# Altium PCB USB-TO-UART.PcbDoc
Units mm, origin at the board's own origin, x right, y up, seen from the top; angles counter-clockwise.
Board outline 51.43 x 35.05 mm, 2 copper layers (Top Layer, Bottom Layer); 35 components, 28 nets, 133 pads, 24 vias.
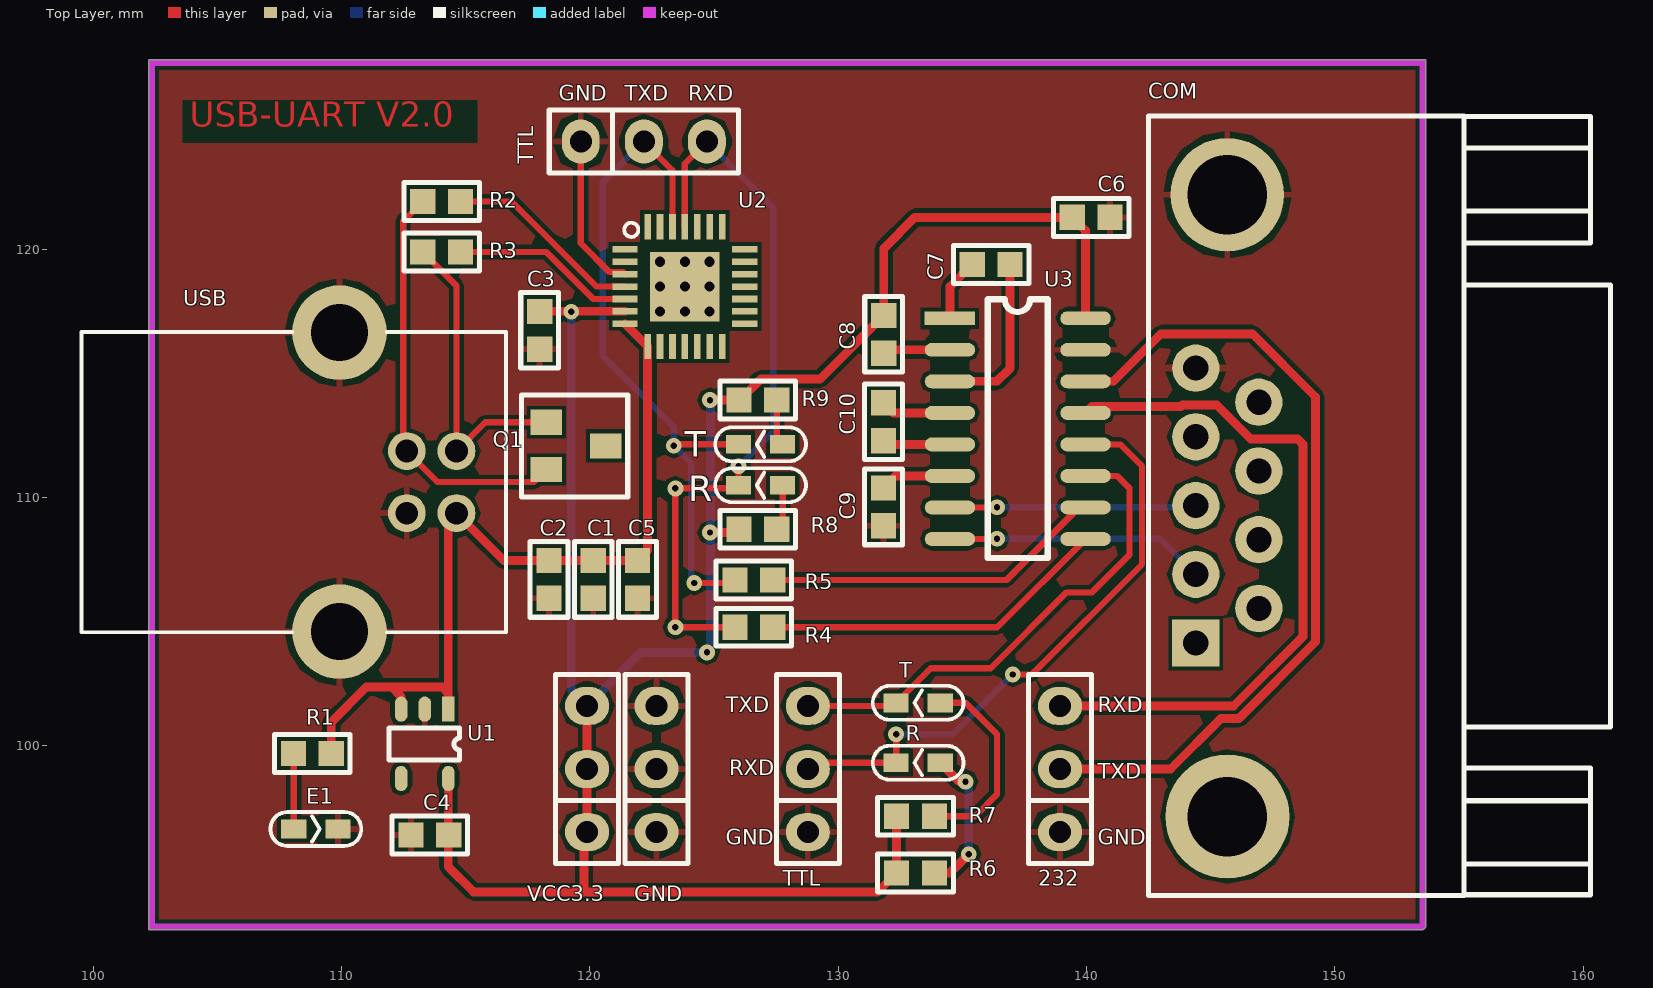
[diagram p0: Top Layer view]
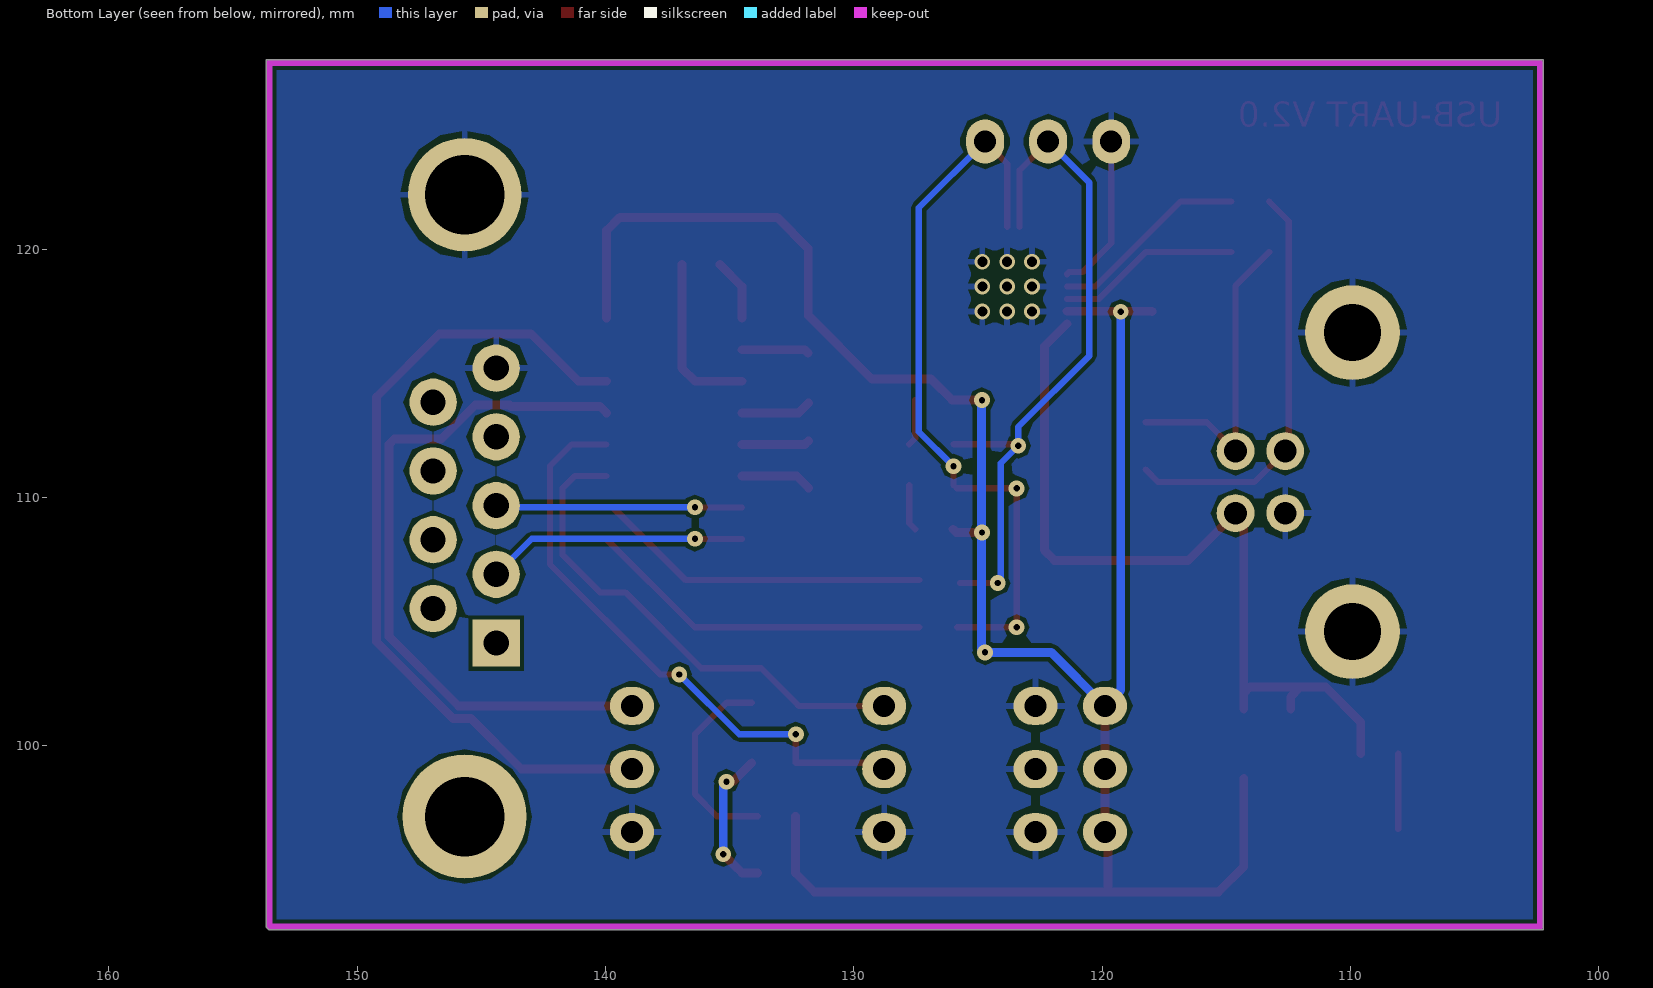
[diagram p1: Bottom Layer view, seen from below]
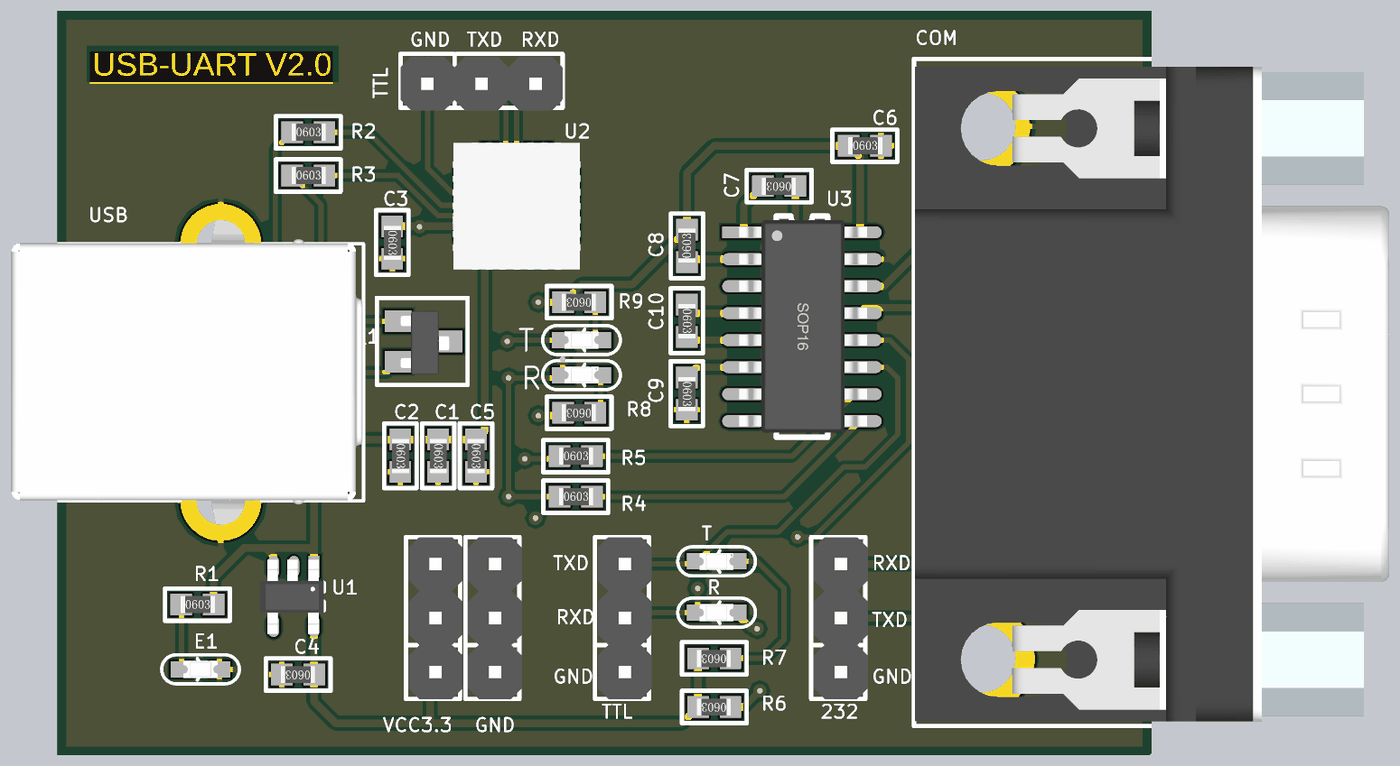
[diagram p2: 3D render of the assembled board from above, using the file's embedded part models]

## Layer stack, top to bottom
Top Layer: signal copper 0.0356
Dielectric: dielectric 0.32, FR-4, Dk 4.8
Bottom Layer: signal copper 0.0356

## Board outline
153.67,127.635 153.67,92.71 153.543,92.583 102.235,92.583 102.235,127.635

## Design rules (kind name [scope] priority, off if disabled: settings)
Clearance [All] p1: gap=0.154
DiffPairsRouting [All] p1: maxlimit=0.254 minlimit=0.054 mostfreqgap=0.254 maxuncoupledlength=12.7
HoleSize [All] p1: absolutevalues=TRUE maxlimit=2.54 minlimit=0.001 maxpercent=80.000 minpercent=20.000
HoleToHoleClearance [All] p1: gap=0 allowstackedmicrovias=TRUE
MinimumSolderMaskSliver [All] p1: minsoldermaskwidth=0
PolygonConnect [All] p1: connectstyle=Relief reliefconductorwidth=0.254 reliefentries=4 polygonreliefangle="90 Angle" airgapwidth=0.254
RoutingVias [All] p1: holewidth=0.711 width=0.27 viastyle="Through Hole" minholewidth=0.011 minwidth=0.27 maxholewidth=0.711 maxwidth=1.27
SilkToSilkClearance [All] p1: silktosilkclearance=0
SilkToSolderMaskClearance [IsPad] p1: minsilkscreentomaskgap=0 clearancetoexposedcopper=TRUE
SolderMaskExpansion [All] p1: expansion=0.102
Width [All] p1: maxlimit=0.354 minlimit=0.054 preferedwidth=0.254
22 further rules are at their usual default settings.

## Components (designator, comment, footprint, x,y, rotation, side; value= is the part's Value field where it differs from the comment)
232 "232" "3 PIN" 138.938,96.52 r90 top (schematic designator CON3)
C1 "10uF" 0603 120.142,107.442 r270 top
C2 "10uF" 0603 118.364,107.442 r270 top
C3 "10uF" 0603 117.983,117.475 r270 top
C4 "10uF" 0603 114.3,96.393 r180 top
C5 "10uF" 0603 121.92,107.442 r270 top
C6 "10uF" 0603 139.446,121.285 r0 top
C7 "10uF" 0603 136.906,119.38 r180 top
C8 "10uF" 0603 131.826,115.824 r90 top
C9 "10uF" 0603 131.826,110.363 r270 top
C10 "10uF" 0603 131.826,113.792 r270 top
COM "UART1" DB9-MALE 144.399,104.14 r180 top (schematic designator COM1)
E1 "LED" LED_0603L 107.823,96.647 r0 top
GND "GND" "3 pin" 122.682,96.52 r90 top (schematic designator CON2)
Q1 "ESD" SOT32-809 118.237,111.125 r0 top
R "LED" LED_0603L 128.016,110.49 r180 top (schematic designator E4)
R "LED" LED_0603L 134.366,99.314 r180 top (schematic designator E2)
R1 "1K" 0603 108.077,99.695 r0 top
R2 "22" 0603 113.284,121.92 r0 top
R3 "22" 0603 113.284,119.888 r0 top
R4 "0" 0603 125.857,104.775 r0 top
R5 "0" 0603 125.857,106.68 r0 top
R6 "1K" 0603 133.858,94.869 r180 top
R7 "1K" 0603 133.858,97.155 r180 top
R8 "1K" 0603 127.508,108.712 r180 top
R9 "1K" 0603 127.508,113.919 r180 top
T "LED" LED_0603L 128.016,112.141 r180 top (schematic designator E5)
T "LED" LED_0603L 134.366,101.727 r180 top (schematic designator E3)
TTL "232" "3 pin" 119.634,124.333 r0 top (schematic designator CON4)
TTL "232" "3 pin" 128.778,96.52 r90 top (schematic designator CON5)
U1 "SPX3819" SOT-23-5 114.3,101.473 r270 top
U2 "CP2102" QFN28 123.825,118.491 r0 top
U3 "SP3232" SO16 134.493,117.221 r0 top
USB "USB" USB-TB 108.077,110.617 r270 top (schematic designator USB1)
VCC3.3 "VCC3.3" "3 pin" 119.888,96.52 r90 top (schematic designator CON1)

## Footprints (in the part's own frame and the unit in brackets; to place one, negate y for a bottom-side part, rotate by r counter-clockwise, add the part's x,y. Pads: shape width x height; smd on the part's side, far side on the other; paste and mask are expansions set on the pad)
"3 PIN" [mil] "3脚传感器"
  oval 60x70 hole 35: 1(0,0) 2(100,0) 3(200,0)
  silkscreen extent -50,-50 250,50, body extent -50,-55 250,45, height 453
"3 pin" [mil] "3脚传感器"
  oval 60x70 hole 35: 1(0,0) 2(100,0) 3(200,0)
  silkscreen extent -50,-50 250,50, body extent -50,-55 250,45, height 453
0603 [mil] "0603封装"
  rect 40x40 smd: 1(-0.68,-0.23) 2(59.32,-0.23)
  silkscreen extent -31,-30 89,30, body extent -1,-16 62,16, height 18
DB9-MALE [mil] "DB9公头接口"
  rect 75x75 hole 40: 1(-0.16,0.28)
  round 75 hole 40: 2(-0.16,-108.72) 3(-0.16,-217.72) 4(-0.16,-326.72) 5(-0.16,-435.72) 6(-100.16,-54.72) 7(-100.16,-163.72) 8(-100.16,-272.72) 9(-100.16,-381.72)
  round 196.85 hole 126: 10(-50.16,275.28)
  round 180 hole 126: 11(-50.17,-710.72)
  silkscreen extent -658,-836 75,400, body extent -805,-821 73,391, height 482
LED_0603L [mil] "LED"
  rect 40x30 smd: 1(10,0) 2(80,0)
  silkscreen extent -27,-27 117,27, body extent 14,-16 77,16, height 24
QFN28 [mil] "QFN28"
  rect 40x10.5 smd: 1(-95,59.06) 2(-95,39.37) 3(-95,19.69) 4(-95,0) 5(-95,-19.69) 6(-95,-39.37) 7(-95,-59.06) 15(95,59.06) 16(95,39.37) 17(95,19.69) 18(95,0) 19(95,-19.69) 20(95,-39.37) 21(95,-59.06)
  rect 110x110 smd: 3(0,0)
  rect 10.5x40 smd: 8(-59.06,-95) 9(-39.37,-95) 10(-19.69,-95) 11(0,-95) 12(19.69,-95) 13(39.37,-95) 14(59.06,-95) 22(59.06,95) 23(39.37,95) 24(19.69,95) 25(0,95) 26(-19.69,95) 27(-39.37,95) 28(-59.06,95)
  silkscreen extent -96,79 -74,101, body extent -118,-120 118,116, height 40
SO16 [mil] "232"
  rect 80x22 smd: 1(0.38,-0.24)
  oval 80x22 smd: 2(0.38,-50.24) 3(0.38,-100.24) 4(0.38,-150.24) 5(0.38,-200.24) 6(0.38,-250.24) 7(0.38,-300.24) 8(0.38,-350.24) 9(215.38,-350.24) 10(215.38,-300.24) 11(215.38,-250.24) 12(215.38,-200.24) 13(215.38,-150.24) 14(215.38,-100.24) 15(215.38,-50.24) 16(215.38,-0.24)
  silkscreen extent 60,-380 155,30, body extent -8,-372 228,22, height 75
SOT32-809 [mil] "ESD"
  rect 50x40 smd: 1(0.52,74.8) 2(0.52,0) 3(94.43,37.4)
  silkscreen extent -39,-43 129,118, body extent 5,-24 96,94, height 28
SOT-23-5 [mil] "SPX3819"
  rect 40x20 smd: 1(0,0)
  oval 40x20 smd: 2(0,-37.4) 3(0,-74.8) 4(110,-74.8) 5(110,0)
  silkscreen extent 30,-94 81,18, body extent -13,-100 125,18, height 43
USB-TB [mil] "USB2.0 Type-B接口"
  round 60 hole 36: 1(49.21,257.87) 2(-49.22,257.87) 3(-49.22,179.13) 4(49.21,179.13)
  round 150 hole 90: 5(-237.01,72.44) 6(237.01,72.44)
  silkscreen extent -238,-337 238,337, body extent -293,-315 290,335, height 433

## Part data
232 GND TTL TTL VCC3.3: library part CON3, "3 pin"
C1 C2 C3 C4 C5 C6 C7 C8 C9 C10: library part "CAP Nonpolarity", "无极电容"
COM: library part DB9, "串口接口"
E1 R R T T: "LED灯"
Q1: "PESD1CAN"
R1 R2 R3 R4 R5 R6 R7 R8 R9: library part R, "电阻"
U1: "稳压器"
U2: "usbתusart"
U3: "232IC"

## Via types
v1: diameter 0.635, hole 0.254, Top Layer to Bottom Layer, tented both sides, 15 vias
v2: diameter 0.635, hole 0.406, Top Layer to Bottom Layer, 9 vias

## Nets (pads, with @x,y where several pads share a name; then routed paths per layer and width w, separated by ;. In a path a pad name is that pad's centre, name@x,y a point inside that pad or via, vN(x,y) a via of type N, cw(c..) or ccw(c..) an arc to the next point about the centre after c; other vN are vias at no path point)
232_RXD: 232.3 U3.13 | length 28.2
  Top Layer w0.354: 232.3 145.923,101.6 148.717,104.394 148.717,112.141 148.507,112.351 146.613,112.351 145.242,113.722 143.872,113.722 143.814,113.665 140.224,113.665 U3.13
232_TXD: 232.2 U3.14 | length 33.4
  Top Layer w0.354: 232.2 143.383,99.06 145.415,101.092 146.133,101.092 149.225,104.184 149.225,114.046 146.685,116.586 143.002,116.586 141.091,114.675 U3.14
CP2102_RXD: R4.1 R.2@125.984,110.49 TTL.3@124.714,124.333 U2.25 | length 29.7
  Top Layer w0.254: U2.25 123.825,123.444 TTL.3@124.714,124.333 ; R4.1@125.834,104.775 v1(123.444,104.775) v1(123.444,110.363) R.2@125.857,110.363 ; R.2@125.984,110.49 v1(125.984,111.252)
  Bottom Layer w0.254: TTL.3@124.714,124.333 127.381,121.666 127.381,112.649 v1(125.984,111.252)
CP2102_TXD: R5.1 T.2@125.984,112.141 TTL.2@122.174,124.333 U2.26 | length 27.9
  Top Layer w0.254: TTL.2@122.174,124.333 123.325,123.182 U2.26 ; v1(123.38,112.078) 123.444,112.141 T.2@125.984,112.141 ; v1(124.206,106.553) R5.1@125.719,106.553
  Bottom Layer w0.254: TTL.2@122.174,124.333 120.523,122.682 120.523,115.697 123.38,112.84 v1(123.38,112.078) 124.079,111.379 v1@124.079,106.68
DB9_RXD: COM.2 U3.8 | length 10.5
  Top Layer w0.254: U3.8 136.392,108.325 v1(136.398,108.331)
  Bottom Layer w0.254: v1(136.398,108.331) 142.974,108.331 COM.2
DB9_TXD: COM.3 U3.7 | length 9.9
  Top Layer w0.254: U3.7 136.392,109.595 v1(136.398,109.601)
  Bottom Layer w0.254: v1(136.398,109.601) 144.334,109.601 COM.3
GND: 232.1 C1.2 C2.2 C3.2 C4.2 C5.2 C6.2 C9.2 COM.5 COM.11 E1.2 GND.1 GND.2 GND.3 TTL.1 U1.2 U2.3 U3.15 USB.4 USB.5 USB.6 | length 6.4
  Top Layer w0.254: TTL.1@119.634,124.333 119.634,120.23 120.788,119.077 121.326,119.077 U2.3@121.412,118.991
  other v2: 122.825,117.491 123.825,117.491 124.825,117.491 122.825,118.491 123.825,118.491 124.825,118.491 122.825,119.491 123.825,119.491 124.825,119.491
NetC7_1: C7.1 U3.3 | length 6.8
  Top Layer w0.354: U3.3 136.392,114.675 136.923,115.206 C7.1
NetC7_2: C7.2 U3.1 | length 2.5
  Top Layer w0.354: U3.1 134.503,118.489 C7.2
NetC8_1: C8.1 U3.2 | length 2.7
  Top Layer w0.354: C8.1 131.97,115.945 U3.2
NetC9_1: C9.1 U3.6 | length 2.9
  Top Layer w0.354: C9.1 132.304,110.865 U3.6
NetC10_1: C10.1 U3.4 | length 2.9
  Top Layer w0.354: C10.1 132.225,113.405 U3.4
NetC10_2: C10.2 U3.5 | length 2.7
  Top Layer w0.354: C10.2 131.971,112.135 U3.5
NetE1_1: E1.1 R1.1 | length 3
  Top Layer w0.254: R1.1 108.077,99.672 E1.1
NetE2_1: R6.1 R.1@134.112,99.314 | length 6
  Top Layer w0.354: R6.1 134.499,94.875 134.796,95.172 v1(135.255,95.631) ; R.1@134.112,99.314 134.874,98.552 v1(135.128,98.552)
  Bottom Layer w0.354: v1(135.128,98.552) 135.255,98.425 v1(135.255,95.631)
NetE3_1: R7.1 T.1@134.112,101.727 | length 8.1
  Top Layer w0.254: R7.1 135.515,97.161 136.398,98.044 136.398,100.457 135.128,101.727 T.1@134.112,101.727
NetE4_1: R8.1 R.1@127.762,110.49 | length 1.9
  Top Layer w0.254: R8.1 127.762,108.955 R.1@127.762,110.49
NetE5_1: R9.1 T.1@127.762,112.141 | length 1.9
  Top Layer w0.254: R9.1 127.525,112.378 T.1@127.762,112.141
NetR2_2: R2.2 U2.4 | length 8
  Top Layer w0.254: R2.2 116.846,121.914 120.269,118.491 U2.4
NetR3_2: R3.2 U2.5 | length 7.4
  Top Layer w0.254: R3.2 118.243,119.882 120.134,117.991 U2.5
NetR4_2: R4.2 U3.9 | length 14.1
  Top Layer w0.254: R4.2 136.408,104.769 U3.9
NetR5_2: R5.2 U3.10 | length 13.5
  Top Layer w0.254: R5.2 136.779,106.674 U3.10@139.7,109.595
TTL_RXD: R.2@132.334,99.314 TTL.2@128.778,99.06 U3.12 | length 24.1
  Top Layer w0.254: TTL.2@128.778,99.06 129.032,99.314 132.334,99.314 v1(132.334,100.457) ; v1(137.033,102.87) 137.795,102.87 142.24,107.315 142.24,111.252 141.357,112.135 U3.12
  Bottom Layer w0.254: v1(132.334,100.457) 134.62,100.457 v1(137.033,102.87)
TTL_TXD: T.2@132.334,101.727 TTL.3@128.778,101.6 U3.11 | length 20.1
  Top Layer w0.254: TTL.3@128.778,101.6 132.207,101.6 132.334,101.727 133.731,103.124 136.144,103.124 139.192,106.172 140.208,106.172 141.732,107.696 141.732,110.363 141.23,110.865 U3.11
USB_5V: C1.1 C2.1 C5.1 R1.2 U1.1 U1.3 U2.7 U2.8 USB.1 | length 34.3
  Top Layer w0.354: R1.2 109.584,100.948 110.998,102.362 112.014,102.362 ; U1.3 112.4,101.976 112.014,102.362 ; U1.1 114.3,102.108 ; U2.7 U2.8 122.325,107.87 C5.1 C1.1 C2.1 116.535,107.459 USB.1 114.3,109.04 114.3,102.108 ; C5.1@121.911,107.462 C5.1@122.198,107.749 ; 112.014,102.362 114.046,102.362 114.3,102.108
USB_DM: Q1.1 R3.1 USB.2 | length 12.7
  Top Layer w0.254: R3.1 114.627,118.522 USB.2 115.785,113.025 Q1.1
USB_DP: Q1.2 R2.1 USB.3 | length 16.8
  Top Layer w0.254: R2.1 112.478,121.125 112.478,112.017 USB.3 113.877,110.617 117.742,110.617 Q1.2
VCC3.3: C3.1 C4.1 C6.1 C8.2 R6.2 R7.2 R8.2 R9.2 U1.5 U2.6 U3.16 VCC3.3.1 VCC3.3.2 VCC3.3.3 | length 92.4
  Top Layer w0.354: U1.5 114.3,95.123 115.316,94.107 119.761,94.107 ; C3.1 117.984,117.499 U2.6@121.412,117.499 ; VCC3.3.3 VCC3.3.2 VCC3.3.1 119.761,96.393 119.761,94.107 ; v1(124.841,108.585) 125.868,108.585 R8.2 ; v1(124.841,113.919) 125.995,113.919 R9.2 126.041,113.925 126.88,114.764 129.265,114.764 C8.2 131.832,120.021 133.09,121.279 C6.1 139.964,120.744 U3.16 ; R7.2 R6.2 131.583,94.107 119.761,94.107
  Bottom Layer w0.354: v1(119.253,117.475) 119.253,102.235 VCC3.3.3 122.047,103.759 v1(124.714,103.759) 124.855,103.9 124.855,108.571 v1(124.841,108.585) 124.855,108.599 124.855,113.905 v1(124.841,113.919)
pads on no net: COM.1 COM.4 COM.6 COM.7 COM.8 COM.9 COM.10 Q1.3 U1.4 U2.1 U2.2 U2.9 U2.10 U2.11 U2.12 U2.13 U2.14 U2.15 U2.16 U2.17 U2.18 U2.19 U2.20 U2.21 U2.22 U2.23 U2.24 U2.27 U2.28

## Polygon pours and split planes (outlines as drawn)
GND on Bottom Layer "Top Layer-No Net" (solid, pour order 4): 102.235,127.635 153.67,127.635 153.67,92.583 102.235,92.583
GND on Top Layer "Top Layer-No Net" (solid, pour order 3): 102.235,127.635 153.67,127.635 153.67,92.583 102.235,92.583

## Keep-outs
Keep-Out Layer:
  lines w0.254: 102.362,92.71 102.362,127.508 153.543,127.508 153.543,92.71 102.362,92.71

## Other copper
Top Layer:
  text "USB-UART V2.0" at 103.886,124.587 h1.72

## Silkscreen, mask and mechanical layers (free items; w line width, h text height)
Top Overlay:
  text "GND" at 118.745,125.984 h0.62
  text "TXD" at 121.412,125.984 h0.62
  text "RXD" at 123.952,125.984 h0.62
  text "TXD" at 125.476,101.346 h0.62
  text "RXD" at 140.462,101.346 h0.62
  text "RXD" at 125.603,98.806 h0.62
  text "TXD" at 140.462,98.679 h0.62
  text "GND" at 125.476,96.012 h0.62
  text "GND" at 140.462,96.012 h0.62
Top Solder:
  region: 115.189,124.206 115.189,125.73 103.759,125.73 103.759,124.206